# Altium PCB PCB1.PcbDoc
Units mm, origin at the board's own origin, x right, y up, seen from the top; angles counter-clockwise.
Board outline 106 x 67.06 mm, 4 copper layers (Top Layer, Signal Layer 1, Signal Layer 2, Bottom Layer), stack 0.778 mm thick; 57 components, 0 nets, 332 pads, 270 vias.
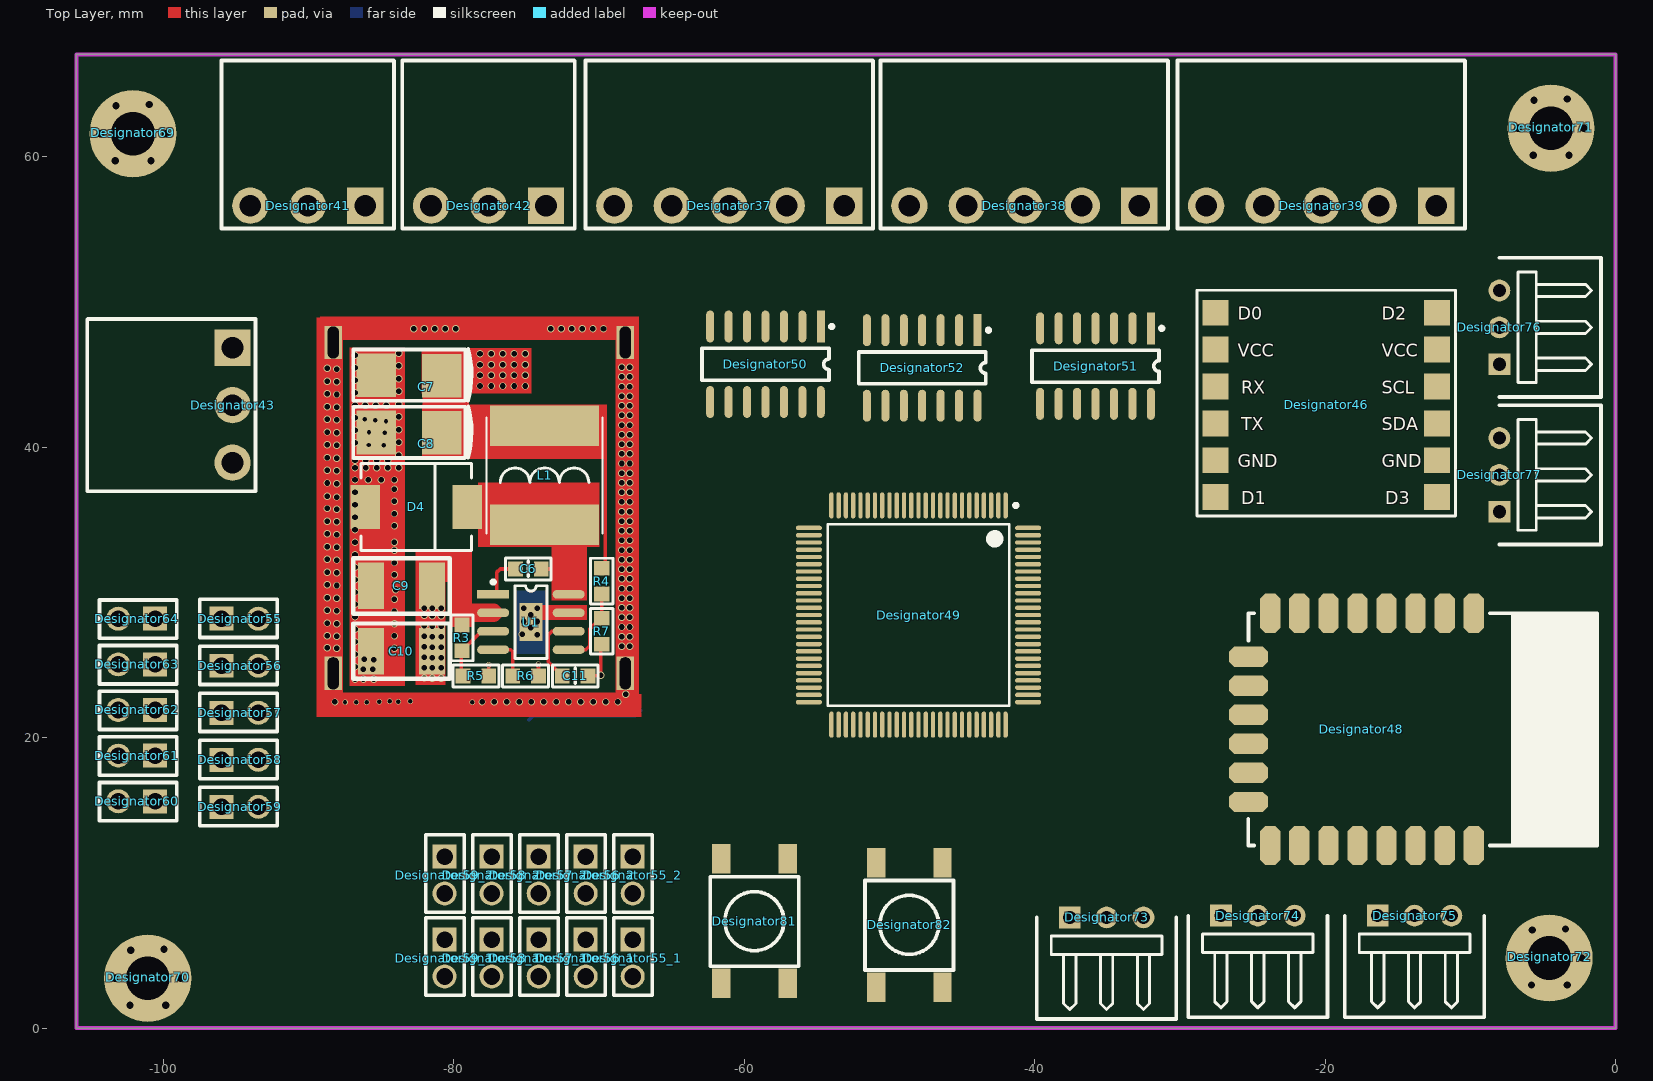
[diagram p0: Top Layer view]
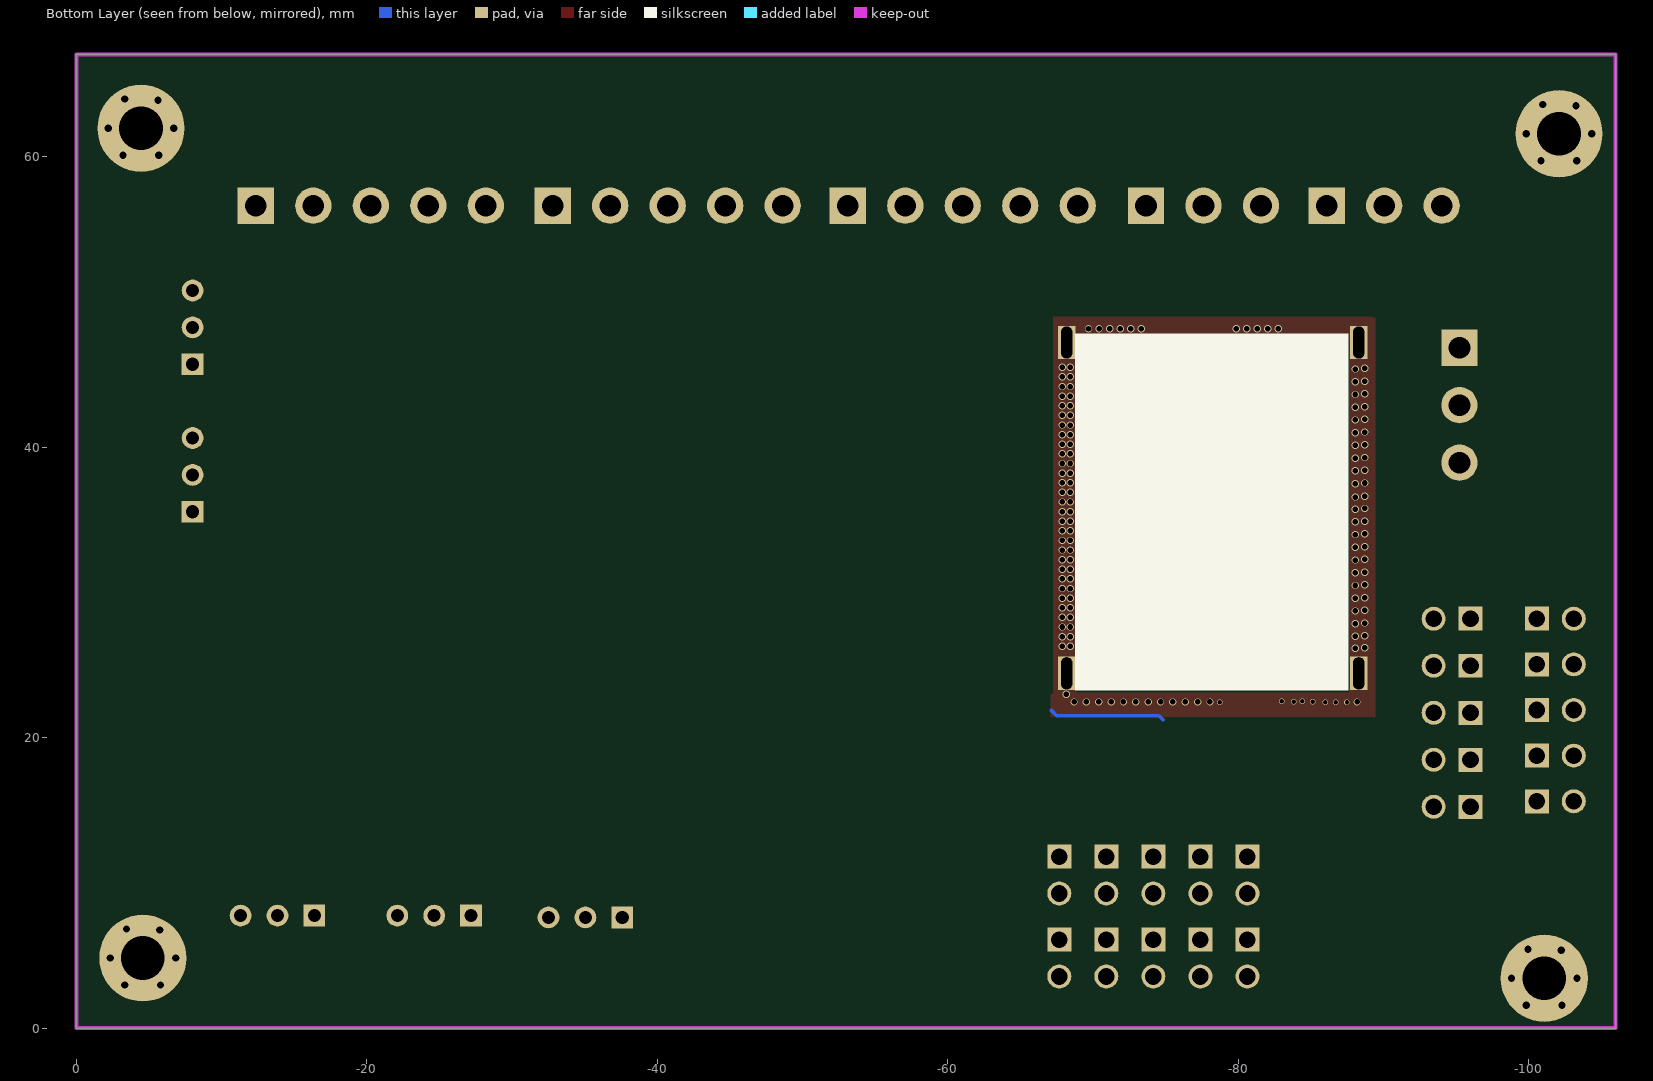
[diagram p1: Bottom Layer view, seen from below]

## Layer stack, top to bottom
Top Solder: solder mask 0.0102, Solder Resist, Dk 3.5
Top Layer: signal copper 0.0356
Dielectric 1: core 0.254, FR-4, Dk 4.2
Signal Layer 1: signal copper 0.036
Dielectric 3: prepreg 0.127, Dk 4.2
Signal Layer 2: signal copper 0.036
Dielectric 2: core 0.254, Dk 4.2
Bottom Layer: signal copper 0.0356
Bottom Solder: solder mask 0.0102, Solder Resist, Dk 3.5

## Board outline
-106,0 0,0 0,67.056 -106,67.056

## Design rules (kind name [scope] priority, off if disabled: settings)
Clearance [All] p1: gap=0.254
PolygonConnect [All] p1: connectstyle=Relief reliefconductorwidth=0.254 reliefentries=4 polygonreliefangle="90 Angle" airgapwidth=0.254
RoutingVias [All] p1: holewidth=0.711 width=1.27 viastyle="Through Hole" minholewidth=0.711 minwidth=1.27 maxholewidth=0.711 maxwidth=1.27
SolderMaskExpansion [All] p1: expansion=0.102
Width [All] p1: maxlimit=0.254 minlimit=0.254 preferedwidth=0.254
30 further rules are at their usual default settings.

## Components (designator, comment, footprint, x,y, rotation, side; value= is the part's Value field where it differs from the comment)
C6 "0.1uF/50V" 0603C -74.879,31.623 r180 top
C7 "100uF/16V" CAPTANC -80.848,44.933 r180 top locked
C8 "100uF/16V" CAPTANC -80.848,40.996 r180 top locked
C9 "47uF/50V" 1812C -83.617,30.455 r180 top
C10 "47uF/50V" 1812C -83.617,25.959 r180 top
C11 "22nF/50V" 0603C -71.653,24.257 r180 top
D4 "MBRS360T3G" DO214AB -79.096,35.89 r180 top
Designator37 "Comment" HT396 -68.961,56.642 r180 top
Designator38 "Comment" HT396 -48.641,56.642 r180 top
Designator39 "Comment" HT396 -28.194,56.642 r180 top
Designator41 "Comment" "HT396  3P" -86.106,56.642 r180 top
Designator42 "Comment" "HT396  3P" -73.66,56.642 r180 top
Designator43 "Comment" "HT396  3P" -95.25,46.863 r270 top
Designator46 "Comment" JY-901 -27.559,36.576 r0 top
Designator48 "Comment" ESP8266 -25.273,28.575 r270 top
Designator49 "Comment" LQFP100_N -48.006,28.448 r270 top
Designator50 "Comment" SOP14 -58.547,45.72 r270 top
Designator51 "Comment" SOP14 -35.814,45.593 r270 top
Designator52 "Comment" SOP14 -47.752,45.466 r270 top
Designator55 "Comment" HDR1*2 -94.742,28.194 r0 top
Designator55_1 "Comment" HDR1*2 -67.691,4.826 r270 top
Designator55_2 "Comment" HDR1*2 -67.691,10.541 r270 top
Designator56 "Comment" HDR1*2 -94.742,24.956 r0 top
Designator56_1 "Comment" HDR1*2 -70.929,4.826 r270 top
Designator56_2 "Comment" HDR1*2 -70.929,10.541 r270 top
Designator57 "Comment" HDR1*2 -94.742,21.717 r0 top
Designator57_1 "Comment" HDR1*2 -74.168,4.826 r270 top
Designator57_2 "Comment" HDR1*2 -74.168,10.541 r270 top
Designator58 "Comment" HDR1*2 -94.742,18.479 r0 top
Designator58_1 "Comment" HDR1*2 -77.406,4.826 r270 top
Designator58_2 "Comment" HDR1*2 -77.406,10.541 r270 top
Designator59 "Comment" HDR1*2 -94.742,15.24 r0 top
Designator59_1 "Comment" HDR1*2 -80.645,4.826 r270 top
Designator59_2 "Comment" HDR1*2 -80.645,10.541 r270 top
Designator60 "Comment" HDR1*2 -101.854,15.621 r180 top
Designator61 "Comment" HDR1*2 -101.854,18.764 r180 top
Designator62 "Comment" HDR1*2 -101.854,21.907 r180 top
Designator63 "Comment" HDR1*2 -101.854,25.051 r180 top
Designator64 "Comment" HDR1*2 -101.854,28.194 r180 top
Designator69 "Comment" "PAD 3mm" -102.108,61.595 r0 top
Designator70 "Comment" "PAD 3mm" -101.092,3.429 r0 top
Designator71 "Comment" "PAD 3mm" -4.445,61.976 r0 top
Designator72 "Comment" "PAD 3mm" -4.572,4.826 r0 top
Designator73 "Comment" XH254-3P -35.052,7.62 r0 top
Designator74 "Comment" XH254-3P -24.638,7.747 r0 top
Designator75 "Comment" XH254-3P -13.843,7.747 r0 top
Designator76 "Comment" XH254-3P -8.001,48.26 r90 top
Designator77 "Comment" XH254-3P -8.001,38.1 r90 top
Designator81 "Comment" KEY_SMT -59.309,7.366 r180 top
Designator82 "Comment" KEY_SMT -48.641,7.112 r180 top
L1 "HCNR8040NT8R2,8.2uH,（8*8）" 电感 -73.762,38.075 r90 top
R3 "100K" 0603R -79.324,26.873 r90 top
R4 "46.4K" 0603R -69.698,30.785 r90 top
R5 "12K" 0603R -78.486,24.13 r0 top
R6 "100K" 0603R -75.07,24.13 r0 top
R7 "10K" 0603R -69.698,27.33 r90 top
U1 "LMR14030" LMR14030 -74.701,27.965 r0 top

## Footprints (in the part's own frame and the unit in brackets; to place one, negate y for a bottom-side part, rotate by r counter-clockwise, add the part's x,y. Pads: shape width x height; smd on the part's side, far side on the other; paste and mask are expansions set on the pad)
0603C [mil]
  rect 40x41 smd: 1(-35,0) 2(35,0)
  silkscreen extent -62,-30 62,30, body extent -31,-16 32,16, height 24
0603R [mil]
  rect 40x41 smd: 1(35,5) 2(-35,5)
  silkscreen extent -62,-25 62,35, body extent -31,-11 31,21, height 18
1812C [mm]
  rect 1.8x3.2 smd: 1(-2.1,0) 2(2.1,0)
  silkscreen extent -3.33,-1.91 3.33,1.91, body extent -2.25,-1.6 2.25,1.6, height 1.6
CAPTANC [mm]
  rect 2.7x3 smd: 1(0,0) 2(4.502,-0.025)
  round 0.5 on Top Overlay: ""(-2.388,1.524)
  silkscreen extent -2.06,-1.83 6.1,1.73, body extent -0.84,-1.8 5.26,1.55, height 2.7
DO214AB [mil]
  rect 80x120 smd: 1(275.59,0) 2(0,0)
  silkscreen extent -12,-118 287,118
ESP8266 [mm]
  oct 2.7x1.4 smd: 1(0,15.5) 2(0,13.5) 3(0,11.5) 4(0,9.5) 5(0,7.5) 6(0,5.5) 7(0,3.5) 8(0,1.5) 15(16,1.5) 16(16,3.5) 17(16,5.5) 18(16,7.5) 19(16,9.5) 20(16,11.5) 21(16,13.5) 22(16,15.5)
  oct 1.4x2.7 smd: 9(3,0) 10(5,0) 11(7,0) 12(9,0) 13(11,0) 14(13,0)
  silkscreen extent 0,-0.03 16.03,24
HDR1*2 [mil]
  rect 65x65 hole 45: 1(-50,0)
  round 65 hole 45: 2(50,0)
  silkscreen extent -109,-51 101,53, body extent -104,-49 96,49, height 323
HT396 [mm]
  rect 2.5x2.5 hole 1.5: 1(-15.84,0)
  round 2.5 hole 1.5: 2(-11.88,0) 3(-7.92,0) 4(-3.96,0) 5(0,0)
  silkscreen extent -17.82,-10 1.98,1.57
"HT396  3P" [mm]
  rect 2.5x2.5 hole 1.5: 1(0,0)
  round 2.5 hole 1.5: 2(3.96,0) 3(7.92,0)
  silkscreen extent -1.98,-10 9.9,1.57
JY-901 [mil]
  rect 70x70 smd: 1(0.63,499.63) 2(0.63,399.63) 3(0.63,299.63) 4(0.63,199.63) 5(0.63,99.63) 6(0.63,-0.37) 7(600.63,-0.37) 8(600.63,99.63) 9(600.63,199.63) 10(600.63,299.63) 11(600.63,399.63) 12(600.63,499.63)
  silkscreen extent -49,-51 652,561
KEY_SMT [mil]
  rect 50x80 smd: 1(-90,168.75) 1(-90,-168.75) 2(90,168.75) 2(90,-168.75)
  silkscreen extent -120,-120 120,123, body extent -118,-197 118,197, height 197
LMR14030 [mm]
  rect 2.2x0.6 smd: 1(-2.6,1.905)
  oval 2.2x0.6 smd: 2(-2.6,0.635) 3(-2.6,-0.635) 4(-2.6,-1.905) 5(2.6,-1.905) 6(2.6,-0.635) 7(2.6,0.635) 8(2.6,1.905)
  rect 1.6x2.6 smd: 7(0,0)
  silkscreen extent -2.72,-2.5 1.1,2.88, body extent -2.87,-2.45 3.13,2.45, height 1.7
LQFP100_N [mm]
  oval 1.8x0.3 smd: 1(-7.55,6) 2(-7.55,5.5) 3(-7.55,5) 4(-7.55,4.5) 5(-7.55,4) 6(-7.55,3.5) 7(-7.55,3) 8(-7.55,2.5) 9(-7.55,2) 10(-7.55,1.5) 11(-7.55,1) 12(-7.55,0.5) 13(-7.55,0) 14(-7.55,-0.5) 15(-7.55,-1) 16(-7.55,-1.5) 17(-7.55,-2) 18(-7.55,-2.5) 19(-7.55,-3) 20(-7.55,-3.5) 21(-7.55,-4) 22(-7.55,-4.5) 23(-7.55,-5) 24(-7.55,-5.5) 25(-7.55,-6) 51(7.55,-6) 52(7.55,-5.5) 53(7.55,-5) 54(7.55,-4.5) 55(7.55,-4) 56(7.55,-3.5) 57(7.55,-3) 58(7.55,-2.5) 59(7.55,-2) 60(7.55,-1.5) 61(7.55,-1) 62(7.55,-0.5) 63(7.55,0) 64(7.55,0.5) 65(7.55,1) 66(7.55,1.5) 67(7.55,2) 68(7.55,2.5) 69(7.55,3) 70(7.55,3.5) 71(7.55,4) 72(7.55,4.5) 73(7.55,5) 74(7.55,5.5) 75(7.55,6)
  oval 0.3x1.8 smd: 26(-6,-7.55) 27(-5.5,-7.55) 28(-5,-7.55) 29(-4.5,-7.55) 30(-4,-7.55) 31(-3.5,-7.55) 32(-3,-7.55) 33(-2.5,-7.55) 34(-2,-7.55) 35(-1.5,-7.55) 36(-1,-7.55) 37(-0.5,-7.55) 38(0,-7.55) 39(0.5,-7.55) 40(1,-7.55) 41(1.5,-7.55) 42(2,-7.55) 43(2.5,-7.55) 44(3,-7.55) 45(3.5,-7.55) 46(4,-7.55) 47(4.5,-7.55) 48(5,-7.55) 49(5.5,-7.55) 50(6,-7.55) 76(6,7.55) 77(5.5,7.55) 78(5,7.55) 79(4.5,7.55) 80(4,7.55) 81(3.5,7.55) 82(3,7.55) 83(2.5,7.55) 84(2,7.55) 85(1.5,7.55) 86(1,7.55) 87(0.5,7.55) 88(0,7.55) 89(-0.5,7.55) 90(-1,7.55) 91(-1.5,7.55) 92(-2,7.55) 93(-2.5,7.55) 94(-3,7.55) 95(-3.5,7.55) 96(-4,7.55) 97(-4.5,7.55) 98(-5,7.55) 99(-5.5,7.55) 100(-6,7.55)
  silkscreen extent -7.67,-6.25 6.25,6.83
"PAD 3mm" [mm]
  round 1 hole 0.5: 0(-2.261,0) 0(-1.219,-1.854) 0(-1.168,1.93) 0(1.118,2.007) 0(1.245,-1.854) 0(2.25,0)
  round 6 hole 3: 0(0,0)
SOP14 [mm]
  rect 2.2x0.55 smd: 1(-2.6,3.81)
  oval 2.2x0.55 smd: 2(-2.6,2.54) 3(-2.6,1.27) 4(-2.6,0) 5(-2.6,-1.27) 6(-2.6,-2.54) 7(-2.6,-3.81) 8(2.6,-3.81) 9(2.6,-2.54) 10(2.6,-1.27) 11(2.6,0) 12(2.6,1.27) 13(2.6,2.54) 14(2.6,3.81)
  silkscreen extent -2.72,-4.37 1.1,4.68, body extent -3.1,-4.35 3.1,4.35, height 1.61
XH254-3P [mm] "Connector; Header; 5 Position"
  rect 1.5x1.5 hole 0.9: 1(-2.54,0)
  round 1.5 hole 0.9: 2(0,0) 3(2.54,0)
  silkscreen extent -4.8,-7 4.8,0
电感 [mm]
  rect 2.8x7.5 smd: 1(-3.4,0) 2(3.4,0)
  silkscreen extent -4,-4 4,4

## Part data
C6 C11: library part 0603C
C7 C8: library part EC, "Electrolytic Capacitor"
C9 C10: library part CAP
D4: library part DIODE_A
L1: library part INDUCTOR, "MSS1260T-103MLD  12*12 10UH 6.92A"
R3 R4 R5 R6 R7: library part RES2A

## Free pads (board coordinates)
  rect 1.2x2.3 hole 0.762 slot 2.2 at 90 deg: 1(-88.316,24.435) 1(-88.316,47.219) 1(-68.199,24.435) 2(-68.199,47.219)

## Via types
v1: diameter 0.508, hole 0.381, Top Layer to Bottom Layer, 253 vias
v2: diameter 0.381, hole 0.305, Top Layer to Bottom Layer, 17 vias

## Nets (pads, with @x,y where several pads share a name; then routed paths per layer and width w, separated by ;. In a path a pad name is that pad's centre, name@x,y a point inside that pad or via, vN(x,y) a via of type N, cw(c..) or ccw(c..) an arc to the next point about the centre after c; other vN are vias at no path point)
pads on no net: C6.1 C6.2 C7. C7.1 C7.2 C8. C8.1 C8.2 C9.1 C9.2 C10.1 C10.2 C11.1 C11.2 D4.1 D4.2 Designator37.1 Designator37.2 Designator37.3 Designator37.4 Designator37.5 Designator38.1 Designator38.2 Designator38.3 Designator38.4 Designator38.5 Designator39.1 Designator39.2 Designator39.3 Designator39.4 Designator39.5 Designator41.1 Designator41.2 Designator41.3 Designator42.1 Designator42.2 Designator42.3 Designator43.1 Designator43.2 Designator43.3 Designator46.1 Designator46.2 Designator46.3 Designator46.4 Designator46.5 Designator46.6 Designator46.7 Designator46.8 Designator46.9 Designator46.10 Designator46.11 Designator46.12 Designator48.1 Designator48.2 Designator48.3 Designator48.4 Designator48.5 Designator48.6 Designator48.7 Designator48.8 Designator48.9 Designator48.10 Designator48.11 Designator48.12 Designator48.13 Designator48.14 Designator48.15 Designator48.16 Designator48.17 Designator48.18 Designator48.19 Designator48.20 Designator48.21 Designator48.22 Designator49.1 Designator49.2 Designator49.3 Designator49.4 Designator49.5 Designator49.6 Designator49.7 Designator49.8 Designator49.9 Designator49.10 Designator49.11 Designator49.12 Designator49.13 Designator49.14 Designator49.15 Designator49.16 Designator49.17 Designator49.18 Designator49.19 Designator49.20 Designator49.21 Designator49.22 Designator49.23 Designator49.24 Designator49.25 Designator49.26 Designator49.27 Designator49.28 Designator49.29 Designator49.30 Designator49.31 Designator49.32 Designator49.33 Designator49.34 Designator49.35 Designator49.36 Designator49.37 Designator49.38 Designator49.39 Designator49.40 Designator49.41 Designator49.42 Designator49.43 Designator49.44 Designator49.45 Designator49.46 Designator49.47 Designator49.48 Designator49.49 Designator49.50 Designator49.51 Designator49.52 Designator49.53 Designator49.54 Designator49.55 Designator49.56 Designator49.57 Designator49.58 Designator49.59 Designator49.60 Designator49.61 Designator49.62 Designator49.63 Designator49.64 Designator49.65 Designator49.66 Designator49.67 Designator49.68 Designator49.69 Designator49.70 Designator49.71 Designator49.72 Designator49.73 Designator49.74 Designator49.75 Designator49.76 Designator49.77 Designator49.78 Designator49.79 Designator49.80 Designator49.81 Designator49.82 Designator49.83 Designator49.84 Designator49.85 Designator49.86 Designator49.87 Designator49.88 Designator49.89 Designator49.90 Designator49.91 Designator49.92 Designator49.93 Designator49.94 Designator49.95 Designator49.96 Designator49.97 Designator49.98 Designator49.99 Designator49.100 Designator50.1 Designator50.2 Designator50.3 Designator50.4 Designator50.5 Designator50.6 Designator50.7 Designator50.8 Designator50.9 Designator50.10 Designator50.11 Designator50.12 Designator50.13 Designator50.14 Designator51.1 Designator51.2 Designator51.3 Designator51.4 Designator51.5 Designator51.6 Designator51.7 Designator51.8 Designator51.9 Designator51.10 Designator51.11 Designator51.12 Designator51.13 Designator51.14 Designator52.1 Designator52.2 Designator52.3 Designator52.4 Designator52.5 Designator52.6 Designator52.7 Designator52.8 Designator52.9 Designator52.10 Designator52.11 Designator52.12 Designator52.13 Designator52.14 Designator55.1 Designator55.2 Designator55_1.1 Designator55_1.2 Designator55_2.1 Designator55_2.2 Designator56.1 Designator56.2 Designator56_1.1 Designator56_1.2 Designator56_2.1 Designator56_2.2 Designator57.1 Designator57.2 Designator57_1.1 Designator57_1.2 Designator57_2.1 Designator57_2.2 Designator58.1 Designator58.2 Designator58_1.1 Designator58_1.2 Designator58_2.1 Designator58_2.2 Designator59.1 Designator59.2 Designator59_1.1 Designator59_1.2 Designator59_2.1 Designator59_2.2 Designator60.1 Designator60.2 Designator61.1 Designator61.2 Designator62.1 Designator62.2 Designator63.1 Designator63.2 Designator64.1 Designator64.2 Designator69.0 Designator70.0 Designator71.0 Designator72.0 Designator73.1 Designator73.2 Designator73.3 Designator74.1 Designator74.2 Designator74.3 Designator75.1 Designator75.2 Designator75.3 Designator76.1 Designator76.2 Designator76.3 Designator77.1 Designator77.2 Designator77.3 Designator81.1 Designator81.2 Designator82.1 Designator82.2 L1.1 L1.2 R3.1 R3.2 R4.1 R4.2 R5.1 R5.2 R6.1 R6.2 R7.1 R7.2 U1.1 U1.2 U1.3 U1.4 U1.5 U1.6 U1.7 U1.8
copper on no net: | length 139.4
  Top Layer w0.254: v1@-81.915,26.205 -81.915,27.229 ; v1@-81.491,26.179 v1@-81.491,27.203 ; -79.502,25.984 -79.502,24.46 -79.426,24.384 ; -79.451,25.984 -78.181,27.254 -78.181,27.33 -77.301,27.33 -77.301,27.305 ; -77.648,24.188 -77.648,24.384 ; -77.597,24.257 v2(-77.597,25.019) ; -77.301,26.06 -76.098,26.06 -75.959,25.921 -75.959,24.257 ; -77.301,29.87 -77.064,30.108 -77.064,31.369 -76.81,31.623 -75.768,31.623 ; v1(-74.27,27.102) -74.079,26.911 ; -74.181,24.257 v2(-74.181,25.057) ; -73.99,31.623 -72.619,31.623 -72.568,31.572 ; -72.542,24.257 -73.508,25.222 -73.508,27.076 -73.254,27.33 -72.101,27.33 -71.12,27.33 ; -72.076,26.086 -72.101,26.06 -70.917,26.06 -70.637,26.34 -70.637,27.508 -69.901,28.245 ; -70.764,24.257 -69.952,24.257 v1(-69.901,24.308) -69.901,26.467 ; -69.825,28.219 -69.825,29.896 ; -69.825,31.674 -69.571,31.928 -69.571,39.497
  Top Layer w1.27: v1@-88.265,22.53 -88.265,48.031 -68.25,48.031 -68.25,22.462 v1(-88.197,22.462) ; -79.553,28.702 -79.451,28.6 -77.301,28.6
  Bottom Layer w0.254: -74.828,21.234 -74.549,21.514 -67.513,21.514 -67.158,21.869
  other v1: -78.067,22.462 -77.216,22.462 -76.365,22.462 -75.514,22.462 -74.663,22.462 -73.812,22.462 -72.962,22.462 -72.111,22.462 -71.26,22.462 -70.409,22.462 -69.558,22.462 -68.707,22.462 -68.174,22.987 -86.817,24.028 -86.233,24.028 -85.522,24.028 -81.483,24.083 -80.874,24.083 -82.042,24.108 -86.258,24.714 -85.598,24.714 -81.483,24.801 -80.874,24.801 -82.042,24.827 -86.817,24.886 -85.522,25.375 -86.182,25.4 -81.483,25.52 -80.874,25.52 -82.042,25.545 -86.817,25.744 -88.062,26.162 -84.099,26.162 -88.722,26.206 -81.483,26.238 -80.874,26.238 -82.042,26.264 -68.453,26.299 -67.894,26.299 -86.817,26.602 -81.483,26.957 -80.874,26.957 -68.453,26.962 -67.894,26.962 -88.062,26.975 -82.042,26.982 -84.099,27.005 -88.722,27.019 -75.286,27.127 -86.817,27.459 -74.701,27.559 -68.453,27.624 -67.894,27.624 -81.483,27.675 -80.874,27.675 -82.042,27.701 -84.099,27.849 -88.062,27.852 -88.722,27.896 -75.184,28.003 -74.27,28.003 -68.453,28.286 -67.894,28.286 -86.817,28.317 -81.483,28.397 -80.874,28.397 -82.042,28.423 -74.727,28.454 -84.099,28.692 -88.062,28.729 -88.722,28.773 -81.483,28.905 -80.874,28.905 -75.184,28.905 -74.27,28.905 -82.042,28.931 -68.453,28.949 -67.894,28.949 -86.817,29.175 -84.099,29.535 -88.062,29.606 -68.453,29.611 -67.894,29.611 -88.722,29.65 -86.817,30.033 -84.023,30.201 -68.453,30.274 -67.894,30.274 -88.062,30.483 -88.722,30.527 -86.817,30.89 -68.453,30.936 -67.894,30.936 -84.099,31.222 -88.062,31.36 -88.722,31.404 -68.453,31.598 -67.894,31.598 -86.817,31.748 -84.099,32.065 -88.062,32.237 -68.453,32.261 -67.894,32.261 -88.722,32.281 -86.817,32.606 -84.099,32.908 -68.453,32.923 -67.894,32.923 -88.062,33.114 -88.722,33.158 -86.817,33.464 -84.099,33.464 -68.453,33.586 -67.894,33.586 -88.062,33.991 -88.722,34.035 -68.453,34.248 -67.894,34.248 -86.817,34.321 -84.099,34.595 -88.062,34.867 -88.722,34.912 -68.453,34.91 -67.894,34.91 -86.817,35.179 -84.099,35.438 -68.453,35.573 -67.894,35.573 -88.062,35.744 -88.722,35.789 -86.817,36.037 -68.453,36.235 -67.894,36.235 -84.099,36.281 -88.062,36.576 -88.722,36.62 -86.817,36.894 -68.453,36.898 -67.894,36.898 -84.099,37.125 -88.062,37.498 -88.722,37.543 -68.453,37.567 -67.894,37.567 -86.817,37.752 -85.911,37.752 -85.005,37.752 -84.099,37.752 -68.453,38.222 -67.894,38.222 -88.062,38.375 -88.722,38.419 -86.817,38.583 -86.062,38.583 -85.306,38.583 -84.55,38.583 -83.795,38.583 -68.453,38.885 -67.894,38.885 -86.817,39.116 -86.068,39.116 -85.319,39.116 -84.569,39.116 -88.062,39.252 -88.722,39.296 -83.795,39.46 -68.453,39.547 -67.894,39.547 -88.062,40.129 -88.722,40.173 -68.453,40.21 -67.894,40.21 -86.817,40.325 -83.795,40.338 -68.453,40.872 -67.894,40.872 -88.062,41.006 -88.722,41.05 -86.817,41.183 -83.795,41.216 -68.453,41.534 -67.894,41.534 -88.062,41.883 -88.722,41.927 -86.817,42.041 -83.795,42.093 -68.453,42.197 -67.894,42.197 -88.062,42.76 -88.722,42.804 -68.453,42.859 -67.894,42.859 -86.817,42.899 -86.098,42.899 -85.378,42.899 -84.658,42.899 -83.795,42.971 -68.453,43.522 -67.894,43.522 -88.062,43.637 -88.722,43.681 -86.817,43.756 -83.795,43.849 -68.453,44.184 -67.894,44.184 -78.207,44.221 -77.426,44.221 -76.644,44.221 -75.863,44.221 -75.082,44.221 -88.062,44.514 -88.722,44.558 -86.817,44.614 -83.795,44.727 -68.453,44.846 -67.894,44.846 -78.207,44.958 -77.426,44.958 -76.644,44.958 -75.863,44.958 -75.082,44.958 -88.062,45.391 -88.722,45.435 -86.817,45.472 -68.453,45.509 -67.894,45.509 -83.795,45.604 -78.207,45.695 -77.426,45.695 -76.644,45.695 -75.863,45.695 -75.082,45.695 -86.817,46.33 -78.207,46.431 -77.426,46.431 -76.644,46.431 -75.863,46.431 -75.082,46.431 -83.795,46.482 -82.775,48.158 -82.049,48.158 -81.322,48.158 -80.596,48.158 -79.87,48.158 -73.334,48.158 -72.607,48.158 -71.881,48.158 -71.155,48.158 -70.429,48.158 -69.702,48.158
  other v2: -87.503,22.428 -78.74,22.428 -86.741,22.454 -86.004,22.454 -85.141,22.479 -83.845,22.479 -84.43,22.504 -83.007,22.504 -84.836,40.132 -85.877,40.157 -84.76,40.996 -85.852,41.046 -84.684,41.808 -85.42,41.859 -86.157,41.935

## Keep-outs
Keep-Out Layer:
  the board outline again, w0.254

## Other copper
Top Layer:
  region: -80.315,32.944 -80.315,27.635 -78.765,27.635 -78.765,32.944
  region: -74.27,29.134 -74.27,28.092 -70.841,28.092 -70.841,29.134
  region: -82.22,46.838 -82.22,43.713 -74.651,43.713 -74.651,46.838
  region: -82.169,46.584 -82.169,39.218 -78.969,39.218 -78.969,46.584
  region: -82.194,42.951 -82.194,39.192 -69.444,39.192 -69.444,42.951
  region: -87.198,46.888 -87.198,23.571 -83.388,23.571 -83.388,46.888
  region: -78.334,37.567 -78.334,33.147 -69.977,33.147 -69.977,37.567
  region: -73.279,34.087 -73.279,29.439 -70.841,29.439 -70.841,34.087
  region: -82.448,32.944 -82.448,30.734 -79.045,30.734 -79.045,32.944
  region: -82.652,32.944 -82.652,23.622 -80.594,23.622 -80.594,32.944
  region: -87.198,25.705 -87.198,23.597 -85.115,23.597 -85.115,25.705
  region: -68.478,48.997 -68.478,21.666 -67.259,21.666 -67.259,48.997
  region: -89.129,23.012 -89.129,21.438 -67.081,21.438 -67.081,23.012
  region: -89.484,48.946 -89.484,21.438 -87.935,21.438 -87.935,48.946
  region: -89.23,48.997 -89.23,47.701 -67.259,47.701 -67.259,48.997
Bottom Layer:
  region: -75.844,30.15 -75.844,25.781 -73.635,25.781 -73.635,30.15

## Silkscreen, mask and mechanical layers (free items; w line width, h text height)
Bottom Overlay:
  region: -87.605,47.828 -87.605,23.241 -68.783,23.241 -68.783,47.828
Top Solder:
  rectangle: -68.936,21.717 -66.954,49.276
  region: -66.954,21.184 -66.954,23.19 -89.281,23.19 -89.281,21.184
  region: -66.954,47.346 -66.954,49.327 -89.56,49.327 -89.56,47.346
  region: -87.579,49.047 -89.535,49.047 -89.535,21.158 -87.579,21.158
Bottom Solder:
  region: -76.022,30.429 -76.022,25.578 -73.431,25.578 -73.431,30.429

## Text inside footprints (layer, text, board x,y; h text height)
Designator46: Top Overlay "VCC" at -26.019,46.244 h0.89; Top Overlay "VCC" at -16.113,46.244 h0.89; Top Overlay "GND" at -26.019,38.624 h0.89; Top Overlay "GND" at -16.113,38.624 h0.89; Top Overlay "RX" at -25.765,43.704 h0.89; Top Overlay "TX" at -25.765,41.164 h0.89; Top Overlay "SDA" at -16.113,41.164 h0.89; Top Overlay "SCL" at -16.113,43.704 h0.89; Top Overlay "D0" at -26.019,48.784 h0.89; Top Overlay "D1" at -25.765,36.084 h0.89; Top Overlay "D2" at -16.113,48.784 h0.89; Top Overlay "D3" at -15.859,36.084 h0.89